# EAGLE board IRis - Slave PCB Layout (AA) (EAGLE 8.7.0)
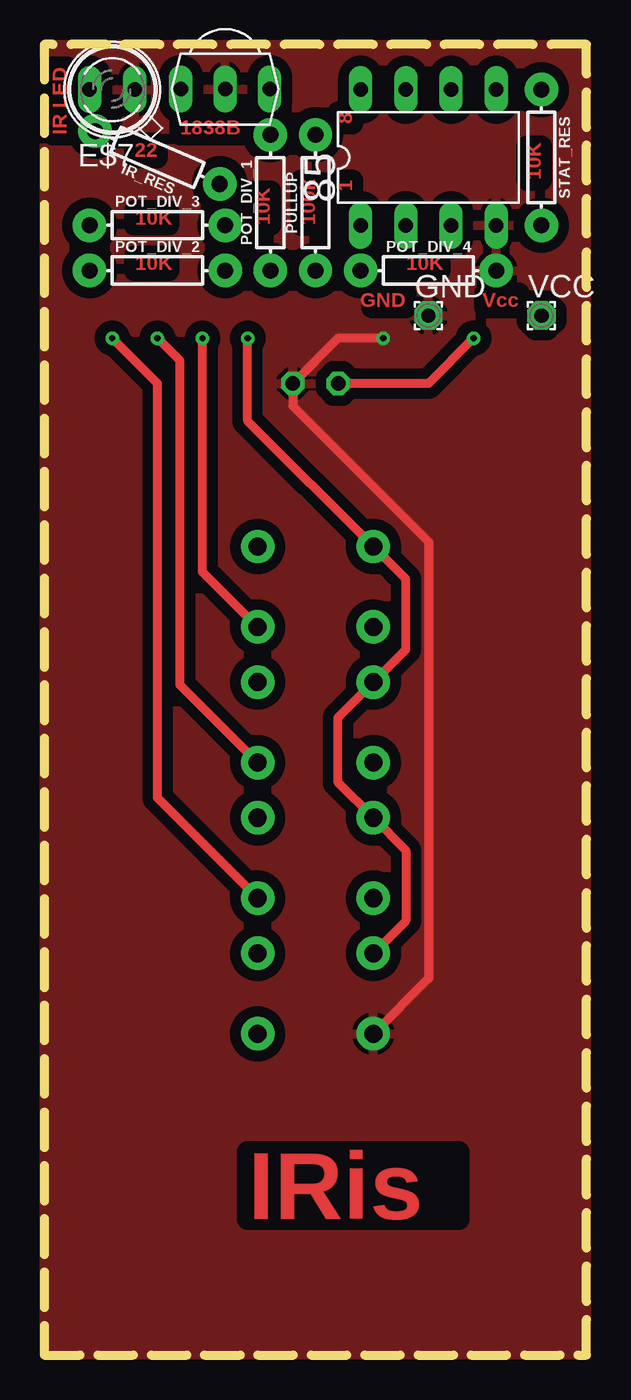
[diagram p0: board, top side]
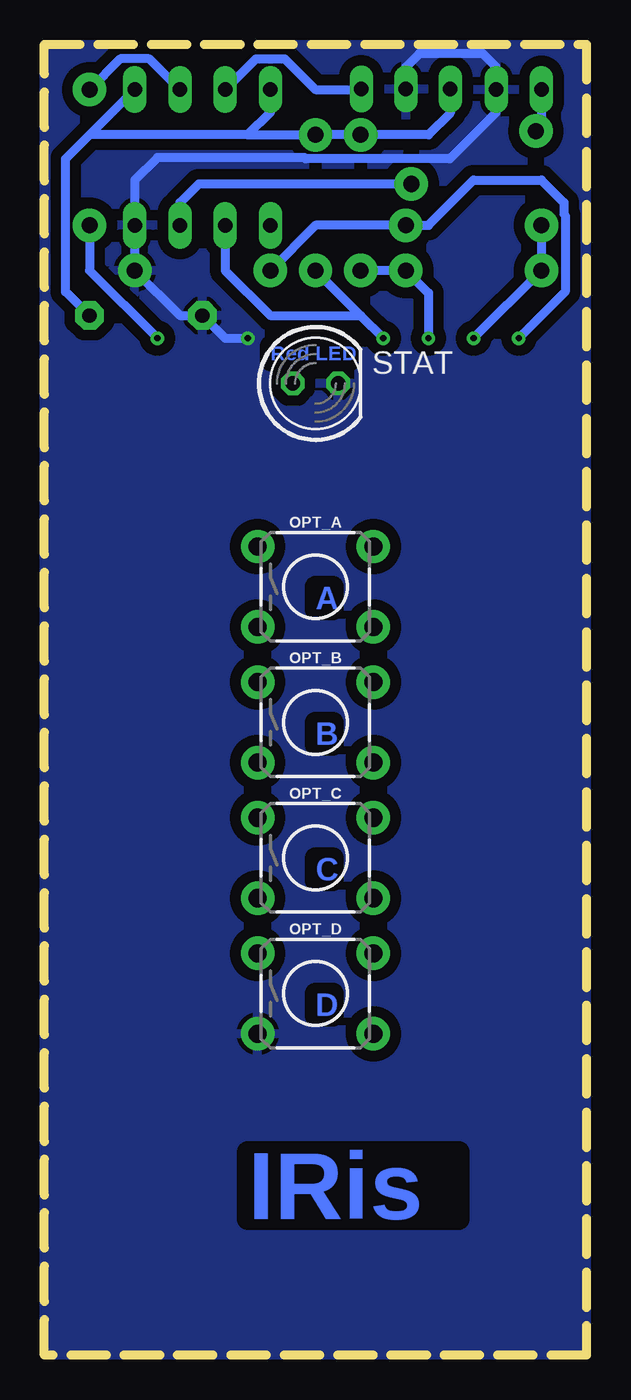
[diagram p1: board, bottom side, seen from below]

Size 30.48 x 73.66 mm. Coordinates in mm from the lower left corner, seen from the top.
Outline: 0,0 30.48,0 30.48,73.66 0,73.66 0,0
Copper layers (1*16): Top 0.035mm / dielectric 1.5mm / Bottom 0.035mm
Design rules "default *": minimum track width 6mil, minimum drill 0.35mm, track to track 6mil, track to pad 6mil, pad to pad 6mil, via to via 6mil, smd to smd 6mil, copper to edge 0mil, drill to drill 6mil, minimum pad ring 10mil, minimum via ring 8mil, stop-mask expansion 4mil, vias tented up to drill 0mil, thermal gap 10mil

## Footprints (pad centres in the part's own frame; a part is rotated, then mirrored left to right if it is on the bottom)
DIL8 = drill 0.813 long: 1 -3.81,-3.81; 2 -1.27,-3.81; 3 1.27,-3.81; 4 3.81,-3.81; 5 3.81,3.81; 6 1.27,3.81; 7 -1.27,3.81; 8 -3.81,3.81
TSOP18XX = drill 0.813 long: GND -0.001,-0.027; OUT -2.501,-0.027; VCC 2.499,-0.027
SFH480 = drill 0.813 long: A 1.27,0; K -1.27,0
1,6/0,8 = drill 0.813 pad 1.6 octagon: 1 0,0
AXIAL-0.3 = drill 0.9 pad 1.88: P$1 -3.81,0; P$2 3.81,0
TACTILE_SWITCH_PTH_6.0MM = drill 1.016 pad 1.88: 1 -3.251,2.261; 2 3.251,2.261; 3 -3.251,-2.261; 4 3.251,-2.261
LED5MM = drill 0.813 octagon: A -1.27,0; K 1.27,0

## Placement (x,y rotation side)
85  [DIL8]  21.59,67.31 0 top
E$6  [TSOP18XX]  10.16,71.12 180 top
E$7  [SFH480]  3.81,71.12 180 top
GND  [1,6/0,8]  21.59,58.42 0 top
IR_RES  22  [AXIAL-0.3]  6.35,67.31 157 top
OPT_A  [TACTILE_SWITCH_PTH_6.0MM]  15.24,43.18 0 bottom
OPT_B  [TACTILE_SWITCH_PTH_6.0MM]  15.24,35.56 0 bottom
OPT_C  [TACTILE_SWITCH_PTH_6.0MM]  15.24,27.94 0 bottom
OPT_D  [TACTILE_SWITCH_PTH_6.0MM]  15.24,20.32 0 bottom
POT_DIV_1  10k  [AXIAL-0.3]  12.7,64.77 90 top
POT_DIV_2  10k  [AXIAL-0.3]  6.35,60.96 0 top
POT_DIV_3  10k  [AXIAL-0.3]  6.35,63.5 0 top
POT_DIV_4  10k  [AXIAL-0.3]  21.59,60.96 0 top
PULLUP  100k  [AXIAL-0.3]  15.24,64.77 90 top
STAT  [LED5MM]  15.24,54.61 0 bottom
STAT_RES  10k  [AXIAL-0.3]  27.94,67.31 270 top
VCC  [1,6/0,8]  27.94,58.42 0 top

## Library data of the parts
85 = microchip
E$6 = tsop
E$7 STAT = led
GND VCC = wirepad
IR_RES POT_DIV_1-POT_DIV_4 PULLUP STAT_RES = SparkFun-Resistors
OPT_A OPT_B OPT_C OPT_D = SparkFun-Switches

## Nets
GND: 85.4 E$6.GND E$7.K GND.1 OPT_D.3 POT_DIV_4.P$2 STAT.K
OPT_IP: 85.2 OPT_A.1 OPT_B.1 OPT_C.1 OPT_D.1 PULLUP.P$1
S$1: OPT_A.4 POT_DIV_1.P$1 POT_DIV_2.P$2
S$2: 85.7 E$6.OUT
S$3: 85.6 STAT_RES.P$1
S$4: E$7.A IR_RES.P$2
S$5: STAT.A STAT_RES.P$2
S$7: 85.3 IR_RES.P$1
S$12: OPT_C.4 POT_DIV_3.P$2 POT_DIV_4.P$1
S$13: OPT_B.4 POT_DIV_2.P$1 POT_DIV_3.P$1
VCC: 85.5 85.8 E$6.VCC POT_DIV_1.P$2 PULLUP.P$2 VCC.1

## Tracks (layer width: path | path; a pad name or v marks a point on that pad's centre or on a via)
GND  (via drill 0.35)
  Top 0.508: v19.05,57.15 16.51,57.15 STAT.K 13.97,53.34 21.59,45.72 21.59,21.16 OPT_D.3
  Bottom 0.508: E$6.GND 10.16,72.39 9.4,73.15 5.84,73.15 5.08,72.39 E$7.K 5.08,69.85 7.7,67.23 15.8,67.23 15.87,67.31 24.13,67.31 25.4,66.04 85.4 POT_DIV_4.P$2 22.86,58.42 GND.1 20.32,57.15 v19.05,57.15
  pour Bottom (isolate 0.61): 0,0 30.48,0 30.48,73.66 0,73.66
  pour Top (isolate 0.61): 0,0 0,73.66 30.48,73.66 30.48,0
OPT_IP  (via drill 0.35)
  Top 0.508: OPT_D.1 20.32,24.41 20.32,28.37 OPT_C.1 16.51,32.18 16.51,35.84 OPT_B.1 20.32,39.65 20.32,43.61 OPT_A.1 11.43,52.5 v11.43,57.15
  Bottom 0.508: 85.2 20.32,60.96 17.78,58.42 12.7,58.42 | 12.7,58.42 PULLUP.P$1 | 12.7,58.42 v11.43,57.15
S$1  (via drill 0.35)
  Top 0.508: OPT_A.4 8.89,44.02 v8.89,57.15
  Bottom 0.508: POT_DIV_1.P$1 POT_DIV_2.P$2 8.89,59.69 v8.89,57.15
S$2
  Bottom 0.508: 85.7 18.59,72.85 16.97,72.85 15.24,71.12 12.69,71.12 E$6.OUT
S$3
  Bottom 0.508: 85.6 24.59,72.85 26.21,72.85 STAT_RES.P$1
S$4
  Bottom 0.508: IR_RES.P$2 2.54,69.1 E$7.A
S$5  (via drill 0.35)
  Top 0.508: v24.13,57.15 21.59,54.61 STAT.A
  Bottom 0.508: STAT_RES.P$2 27.94,60.96 v24.13,57.15
S$7
  Bottom 0.508: IR_RES.P$1 21.81,65.82 22.86,64.77 85.3
S$12  (via drill 0.35)
  Top 0.508: OPT_C.4 6.35,31.32 6.35,54.61 v3.81,57.15
  Bottom 0.508: POT_DIV_4.P$1 15.24,63.5 POT_DIV_3.P$2 8.89,63.5 6.35,66.04 2.54,66.04 1.27,64.77 1.27,64.13 1.19,64.06 1.19,59.77 v3.81,57.15
S$13  (via drill 0.35)
  Top 0.508: OPT_B.4 7.62,37.67 7.62,55.88 v6.35,57.15
  Bottom 0.508: POT_DIV_3.P$1 POT_DIV_2.P$1 v6.35,57.15
VCC
  Bottom 0.508: E$6.VCC 7.66,69.81 8.89,68.58 POT_DIV_1.P$2 PULLUP.P$2 19.05,68.58 | 85.8 17.78,69.85 19.05,68.58 | 19.05,68.58 27.94,68.58 | 27.94,68.58 85.5 | VCC.1 29.29,59.77 29.29,67.23 27.94,68.58

## Text on the board
Top: 8 | IR LED | 1838B | 22 | 1 | 10K | 10K | 10K | 100k | 10K | 10K | GND | Vcc | IRis
Bottom: Red LED | A | B | C | D | IRis